# Altium PCB lab1_samarin_usb_rs485.PcbDoc
Units mm, origin at the board's own origin, x right, y up, seen from the top; angles counter-clockwise.
Board outline 78 x 25 mm, 4 copper layers (Top Layer, Signal Layer 1, Signal Layer 2, Bottom Layer), stack 1.522 mm thick; 22 components, 24 nets, 86 pads, 98 vias.
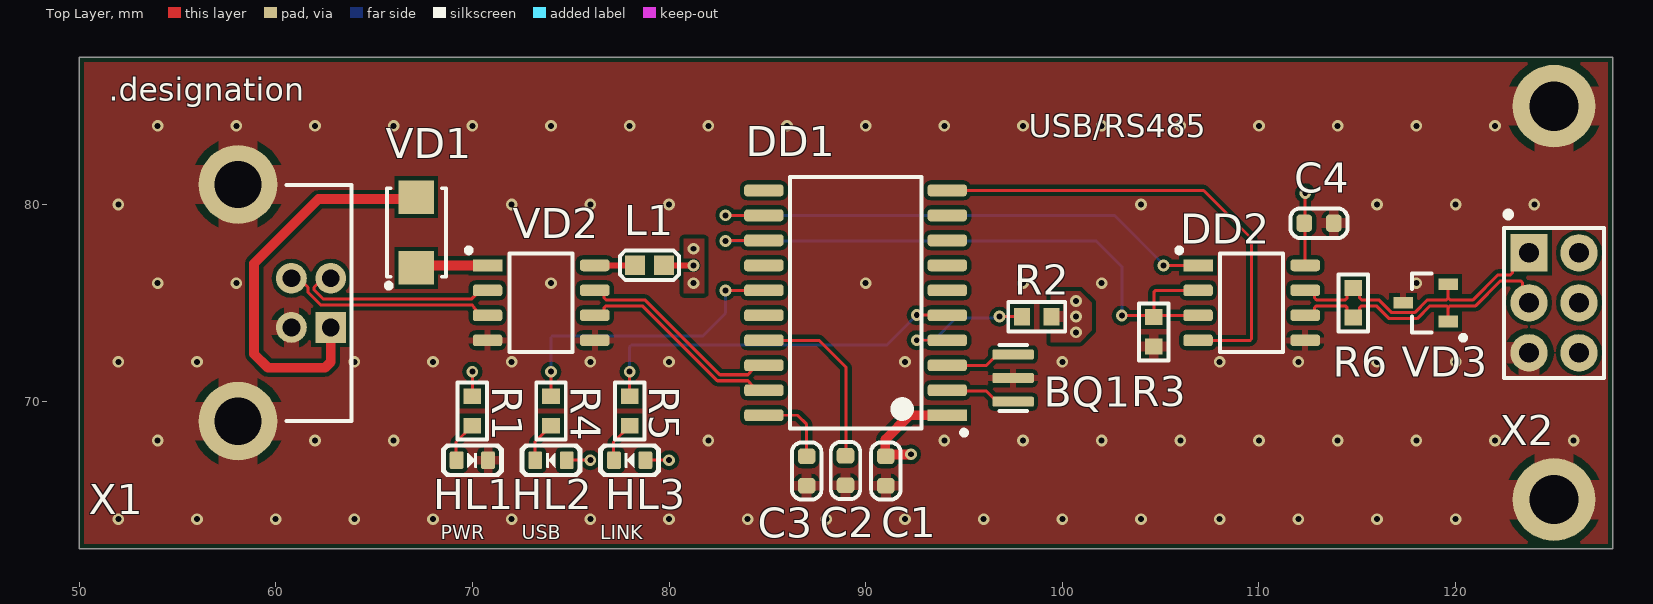
[diagram p0: Top Layer view]
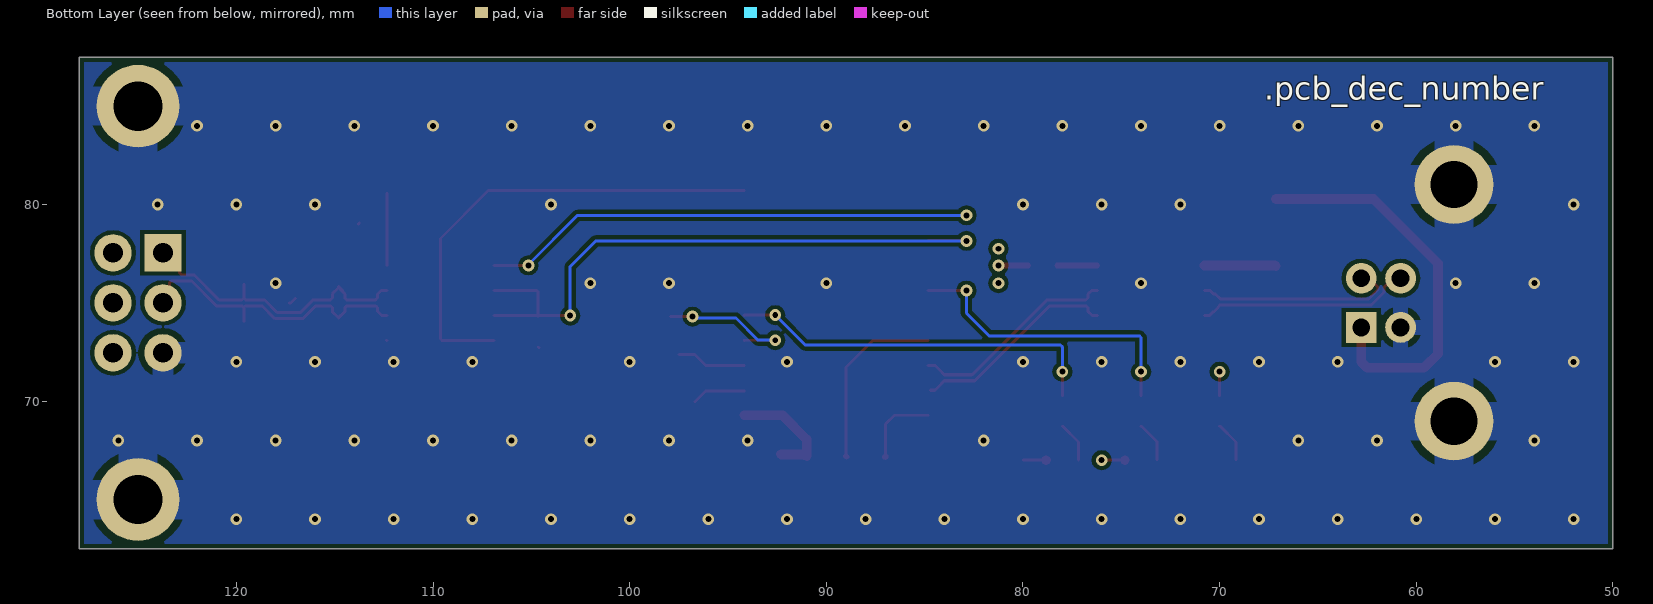
[diagram p1: Bottom Layer view, seen from below]
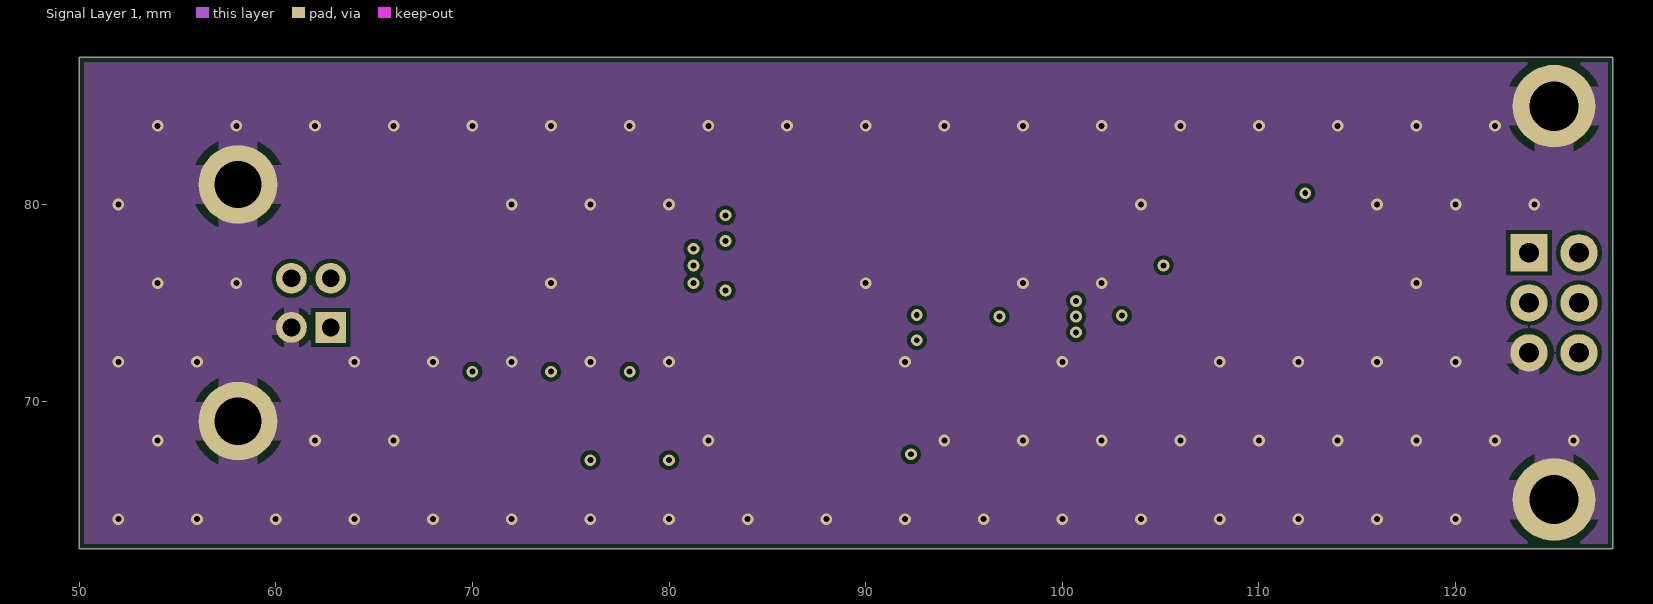
[diagram p2: Signal Layer 1]
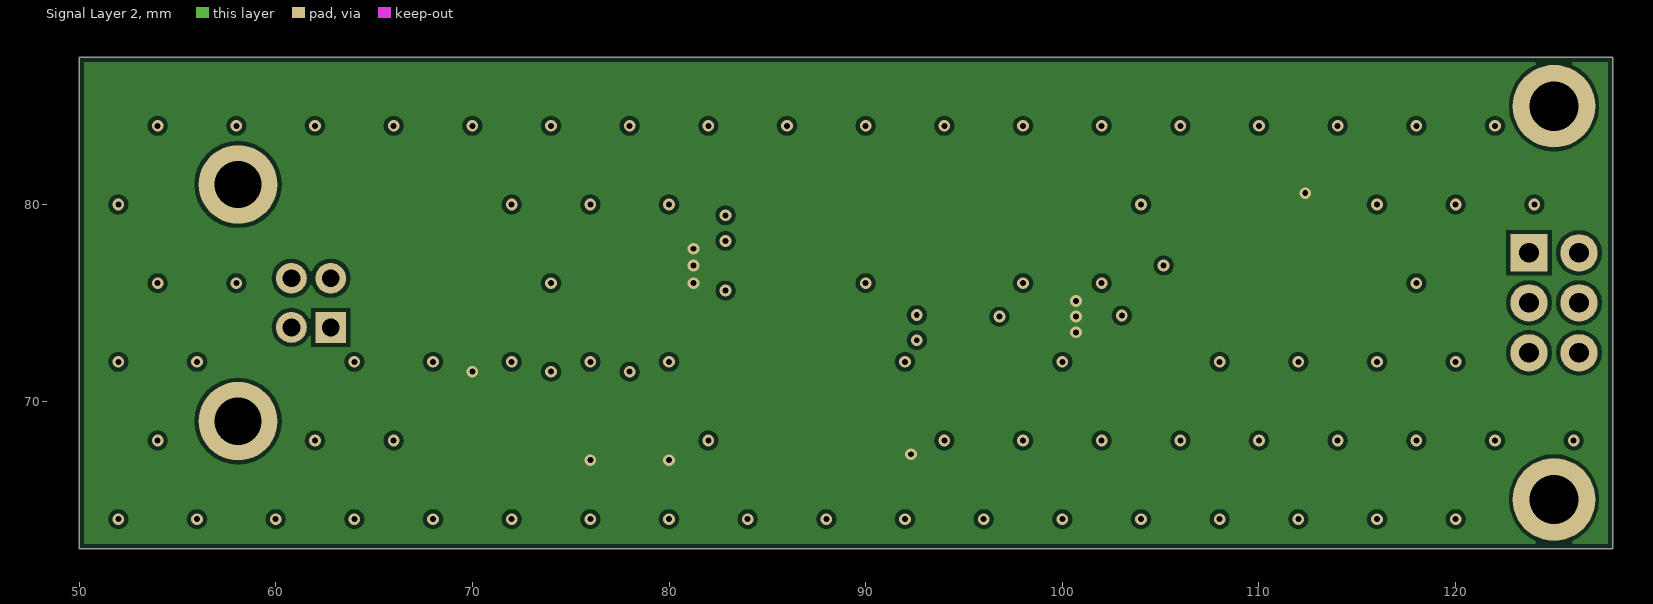
[diagram p3: Signal Layer 2]

## Layer stack, top to bottom
Top Solder: solder mask 0.0102, Solder Resist, Dk 3.5
Top Layer: signal copper 0.018
Prepreg 1: prepreg 0.125, FR4 HiTg170, Dk 5.07
Signal Layer 1: signal copper 0.018
Core 1: core 1.2, FR4, Dk 4.6
Signal Layer 2: signal copper 0.018
Prepreg 2: prepreg 0.125, FR4 HiTg170, Dk 5.07
Bottom Layer: signal copper 0.018
Bottom Solder: solder mask 0.0102, Solder Resist, Dk 3.5

## Board outline
50,62.5 128,62.5 128,87.5 50,87.5

## Design rules (kind name [scope] priority, off if disabled: settings)
AcuteAngle min_acute_angle [OnCopper] p1: minimum=3.50000000000000E+0001 checktracksonly=FALSE // Минимальный угол между примитивами топологии
BoardOutlineClearance board_outline_clearance_std [NOT (OnLayer('Bottom Overlay') OR OnLayer('Top Overlay'))] p1: gap=0.25 ignorepadtopadclearanceinfootprint=FALSE except(0: Arc-SplitContinuation Track-SplitContinuation SMDPad-SplitContinuation THPad-SplitContinuation Via-SplitContinuation Fill-SplitContinuation Poly-SplitContinuation Region-SplitContinuation Text-SplitContinuation) // Отступ элементов топологии от края фрезеруемой печатной платы
Clearance clearance_outer_18um_std [OnTopLayer OR OnBottomLayer] p1: gap=0.125 ignorepadtopadclearanceinfootprint=TRUE except(0.2: Arc-Fill Arc-Poly Track-Fill Track-Poly SMDPad-SMDPad SMDPad-Fill SMDPad-Poly THPad-Fill THPad-Poly Via-Fill Via-Poly Fill-Fill Fill-Poly Poly-Poly Poly-Region Poly-Text; 0.25: Arc-Hole Track-Hole SMDPad-Hole THPad-Hole Via-Hole Fill-Hole Poly-Hole Region-Hole Text-Hole) // Зазоры на внешних слоях
Clearance clearance_inner_18um_std [NOT (OnTopLayer Or OnBottomLayer)] p2: gap=0.125 ignorepadtopadclearanceinfootprint=FALSE except(0.2: Arc-Fill Arc-Poly Track-Fill Track-Poly SMDPad-SMDPad SMDPad-Fill SMDPad-Poly THPad-Fill THPad-Poly Via-Fill Via-Poly Fill-Fill Fill-Poly Poly-Poly Poly-Region Poly-Text; 0.25: Arc-Hole Track-Hole SMDPad-Hole THPad-Hole Via-Hole Fill-Hole Poly-Hole Region-Hole Text-Hole) // Зазоры на внутренних слоях
ComponentClearance [All] p1: gap=0 collisioncheckmode=3 verticalgap=0 showdistances=FALSE
DiffPairsRouting "Schematic Differential Pairs Routing_10" [InNet('RS485_P')] p1: maxlimit=0.254 minlimit=0.15 mostfreqgap=0.254 toplayer_maxgap=0.15 toplayer_prefgap=0.15 toplayer_minwidth=0.155 toplayer_maxwidth=0.155 toplayer_prefwidth=0.155 bottomlayer_maxgap=0.15 bottomlayer_prefgap=0.15 bottomlayer_minwidth=0.155 bottomlayer_maxwidth=0.155 bottomlayer_prefwidth=0.155 impedanceprofiledriven=TRUE impedanceprofileid={1B1F1868-2FFB-4D51-908A-913D90CA9AFC} impedanceprofilevalue=95.000000 maxuncoupledlength=12.7
DiffPairsRouting "Schematic Differential Pairs Routing_9" [InNet('USB_D_IN_P')] p2: maxlimit=0.254 minlimit=0.15 mostfreqgap=0.254 toplayer_maxgap=0.15 toplayer_prefgap=0.15 toplayer_minwidth=0.155 toplayer_maxwidth=0.155 toplayer_prefwidth=0.155 bottomlayer_maxgap=0.15 bottomlayer_prefgap=0.15 bottomlayer_minwidth=0.155 bottomlayer_maxwidth=0.155 bottomlayer_prefwidth=0.155 impedanceprofiledriven=TRUE impedanceprofileid={1B1F1868-2FFB-4D51-908A-913D90CA9AFC} impedanceprofilevalue=95.000000 maxuncoupledlength=12.7
DiffPairsRouting "Schematic Differential Pairs Routing_8" [InNet('USB_D_IN_N')] p3: maxlimit=0.254 minlimit=0.15 mostfreqgap=0.254 toplayer_maxgap=0.15 toplayer_prefgap=0.15 toplayer_minwidth=0.155 toplayer_maxwidth=0.155 toplayer_prefwidth=0.155 bottomlayer_maxgap=0.15 bottomlayer_prefgap=0.15 bottomlayer_minwidth=0.155 bottomlayer_maxwidth=0.155 bottomlayer_prefwidth=0.155 impedanceprofiledriven=TRUE impedanceprofileid={1B1F1868-2FFB-4D51-908A-913D90CA9AFC} impedanceprofilevalue=95.000000 maxuncoupledlength=12.7
DiffPairsRouting "Schematic Differential Pairs Routing_7" [InNet('USB_D_N')] p4: maxlimit=0.254 minlimit=0.15 mostfreqgap=0.254 toplayer_maxgap=0.15 toplayer_prefgap=0.15 toplayer_minwidth=0.155 toplayer_maxwidth=0.155 toplayer_prefwidth=0.155 bottomlayer_maxgap=0.15 bottomlayer_prefgap=0.15 bottomlayer_minwidth=0.155 bottomlayer_maxwidth=0.155 bottomlayer_prefwidth=0.155 impedanceprofiledriven=TRUE impedanceprofileid={1B1F1868-2FFB-4D51-908A-913D90CA9AFC} impedanceprofilevalue=95.000000 maxuncoupledlength=12.7
DiffPairsRouting "Schematic Differential Pairs Routing_6" [InNet('USB_D_P')] p5: maxlimit=0.254 minlimit=0.15 mostfreqgap=0.254 toplayer_maxgap=0.15 toplayer_prefgap=0.15 toplayer_minwidth=0.155 toplayer_maxwidth=0.155 toplayer_prefwidth=0.155 bottomlayer_maxgap=0.15 bottomlayer_prefgap=0.15 bottomlayer_minwidth=0.155 bottomlayer_maxwidth=0.155 bottomlayer_prefwidth=0.155 impedanceprofiledriven=TRUE impedanceprofileid={1B1F1868-2FFB-4D51-908A-913D90CA9AFC} impedanceprofilevalue=95.000000 maxuncoupledlength=12.7
DiffPairsRouting "Schematic Differential Pairs Routing" [InNet('RS485_N')] p6: maxlimit=0.254 minlimit=0.15 mostfreqgap=0.254 toplayer_maxgap=0.15 toplayer_prefgap=0.15 toplayer_minwidth=0.155 toplayer_maxwidth=0.155 toplayer_prefwidth=0.155 bottomlayer_maxgap=0.15 bottomlayer_prefgap=0.15 bottomlayer_minwidth=0.155 bottomlayer_maxwidth=0.155 bottomlayer_prefwidth=0.155 impedanceprofiledriven=TRUE impedanceprofileid={1B1F1868-2FFB-4D51-908A-913D90CA9AFC} impedanceprofilevalue=95.000000 maxuncoupledlength=12.7
DiffPairsRouting "Schematic Differential Pairs Routing_5" [InNet('USB_D_IN_P')] p7: maxlimit=0.254 minlimit=0.15 mostfreqgap=0.254 toplayer_maxgap=0.15 toplayer_prefgap=0.15 toplayer_minwidth=0.155 toplayer_maxwidth=0.155 toplayer_prefwidth=0.155 bottomlayer_maxgap=0.15 bottomlayer_prefgap=0.15 bottomlayer_minwidth=0.155 bottomlayer_maxwidth=0.155 bottomlayer_prefwidth=0.155 impedanceprofiledriven=TRUE impedanceprofileid={1B1F1868-2FFB-4D51-908A-913D90CA9AFC} impedanceprofilevalue=95.000000 maxuncoupledlength=12.7
DiffPairsRouting "Schematic Differential Pairs Routing_4" [InNet('RS485_N')] p8: maxlimit=0.254 minlimit=0.15 mostfreqgap=0.254 toplayer_maxgap=0.15 toplayer_prefgap=0.15 toplayer_minwidth=0.155 toplayer_maxwidth=0.155 toplayer_prefwidth=0.155 bottomlayer_maxgap=0.15 bottomlayer_prefgap=0.15 bottomlayer_minwidth=0.155 bottomlayer_maxwidth=0.155 bottomlayer_prefwidth=0.155 impedanceprofiledriven=TRUE impedanceprofileid={1B1F1868-2FFB-4D51-908A-913D90CA9AFC} impedanceprofilevalue=95.000000 maxuncoupledlength=12.7
DiffPairsRouting "Schematic Differential Pairs Routing_3" [InNet('USB_D_P')] p9: maxlimit=0.254 minlimit=0.15 mostfreqgap=0.254 toplayer_maxgap=0.15 toplayer_prefgap=0.15 toplayer_minwidth=0.155 toplayer_maxwidth=0.155 toplayer_prefwidth=0.155 bottomlayer_maxgap=0.15 bottomlayer_prefgap=0.15 bottomlayer_minwidth=0.155 bottomlayer_maxwidth=0.155 bottomlayer_prefwidth=0.155 impedanceprofiledriven=TRUE impedanceprofileid={1B1F1868-2FFB-4D51-908A-913D90CA9AFC} impedanceprofilevalue=95.000000 maxuncoupledlength=12.7
DiffPairsRouting "Schematic Differential Pairs Routing_2" [InNet('USB_D_N')] p10: maxlimit=0.254 minlimit=0.15 mostfreqgap=0.254 toplayer_maxgap=0.15 toplayer_prefgap=0.15 toplayer_minwidth=0.155 toplayer_maxwidth=0.155 toplayer_prefwidth=0.155 bottomlayer_maxgap=0.15 bottomlayer_prefgap=0.15 bottomlayer_minwidth=0.155 bottomlayer_maxwidth=0.155 bottomlayer_prefwidth=0.155 impedanceprofiledriven=TRUE impedanceprofileid={1B1F1868-2FFB-4D51-908A-913D90CA9AFC} impedanceprofilevalue=95.000000 maxuncoupledlength=12.7
DiffPairsRouting diff_pairs_routing [All] p11: maxlimit=0.254 minlimit=0.127 mostfreqgap=0.254 toplayer_maxgap=0.127 toplayer_prefgap=0.127 toplayer_minwidth=0.143 toplayer_maxwidth=0.143 toplayer_prefwidth=0.143 midlayer1_minwidth=0.381 midlayer1_maxwidth=0.381 midlayer1_prefwidth=0.381 midlayer2_minwidth=0.381 midlayer2_maxwidth=0.381 midlayer2_prefwidth=0.381 bottomlayer_maxgap=0.127 bottomlayer_prefgap=0.127 bottomlayer_minwidth=0.143 bottomlayer_maxwidth=0.143 bottomlayer_prefwidth=0.143 impedanceprofiledriven=TRUE maxuncoupledlength=12.7 // Правила трассировки дифференциальных пар
HoleSize min_hole_size_std [IsPad] p1: absolutevalues=TRUE maxlimit=5.9 minlimit=0.6 maxpercent=80.000 minpercent=20.000 // Диаметр межслойного переходного отверстия
HoleSize min_hole_size_via_std [IsVia] p2: absolutevalues=TRUE maxlimit=5.9 minlimit=0.3 maxpercent=80.000 minpercent=20.000 // Минимальный диаметр монтажного отверстия
HoleToHoleClearance hole_to_hole_clearance_std [All] p1: gap=0.2 allowstackedmicrovias=FALSE // Минимальное расстояние между краями двух отверстий
MinimumAnnularRing min_via_ar_std [All] p1: minimumring=0.15 // Поясок площадки переходного отверстия (Annular ring VIA)
MinimumAnnularRing min_pad_ar_std [All] p2: minimumring=0.2 // Поясок монтажной контактной площадки (Annular ring PAD)
MinimumSolderMaskSliver min_solder_mask_bridge_std [All] p1: minsoldermaskwidth=0.15 // Мнимальная ширина масочного мостика
PlaneClearance plane_clearance_18um_std [All] p1: clearance=0.2 // Отступ полигона (для слоя plane) от элементов топологии
PlaneConnect [All] p1: planeconnectstyle=Relief reliefexpansion=0.5 reliefentries=4 reliefconductorwidth=0.2 reliefairgap=0.2
PolygonConnect poly_connect_to_pad<=0.3 [(AsMM(PadXSize_AllLayers)<=0.301) or (AsMM(PadYSize_AllLayers)<=0.301)] p1: thpad.connectstyle=Relief thpad.reliefconductorwidth=0.2 thpad.reliefentries=4 thpad.polygonreliefangle="90 Angle" thpad.airgapwidth=0.2 smdpad.connectstyle=Relief smdpad.reliefconductorwidth=0.2 smdpad.reliefentries=4 smdpad.polygonreliefangle="90 Angle" smdpad.airgapwidth=0.2 via.connectstyle=Direct via.reliefconductorwidth=0.254 via.reliefentries=4 via.polygonreliefangle="90 Angle" via.airgapwidth=0.254 // Правила подключения полигонов для падов от 0,3мм и меньше
PolygonConnect poly_connect_to_pad<=0.4 [(AsMM(PadXSize_AllLayers)<=0.401) or (AsMM(PadYSize_AllLayers)<=0.401)] p2: thpad.connectstyle=Relief thpad.reliefconductorwidth=0.26 thpad.reliefentries=4 thpad.polygonreliefangle="90 Angle" thpad.airgapwidth=0.2 smdpad.connectstyle=Relief smdpad.reliefconductorwidth=0.26 smdpad.reliefentries=4 smdpad.polygonreliefangle="90 Angle" smdpad.airgapwidth=0.2 via.connectstyle=Direct via.reliefconductorwidth=0.254 via.reliefentries=4 via.polygonreliefangle="90 Angle" via.airgapwidth=0.254 // Правила подключения полигонов для падов от 0,4 и меньше
PolygonConnect poly_connect_to_pad<=0.6 [(AsMM(PadXSize_AllLayers)<=0.601) or (AsMM(PadYSize_AllLayers)<=0.601)] p3: thpad.connectstyle=Relief thpad.reliefconductorwidth=0.33 thpad.reliefentries=4 thpad.polygonreliefangle="90 Angle" thpad.airgapwidth=0.2 smdpad.connectstyle=Relief smdpad.reliefconductorwidth=0.33 smdpad.reliefentries=4 smdpad.polygonreliefangle="90 Angle" smdpad.airgapwidth=0.2 via.connectstyle=Direct via.reliefconductorwidth=0.254 via.reliefentries=4 via.polygonreliefangle="90 Angle" via.airgapwidth=0.254 // Правила подключения полигонов для падов от 0,6мм и меньше
PolygonConnect poly_connect_to_pad<=0.7 [(AsMM(PadXSize_AllLayers)<=0.701) or (AsMM(PadYSize_AllLayers)<=0.701)] p4: thpad.connectstyle=Relief thpad.reliefconductorwidth=0.46 thpad.reliefentries=4 thpad.polygonreliefangle="90 Angle" thpad.airgapwidth=0.2 smdpad.connectstyle=Relief smdpad.reliefconductorwidth=0.46 smdpad.reliefentries=4 smdpad.polygonreliefangle="90 Angle" smdpad.airgapwidth=0.2 via.connectstyle=Direct via.reliefconductorwidth=0.254 via.reliefentries=4 via.polygonreliefangle="90 Angle" via.airgapwidth=0.254 // Правила подключения полигонов для падов от 0,7мм и меньше
PolygonConnect poly_connect_to_pad<=0.8 [(AsMM(PadXSize_AllLayers)<=0.8)or(AsMM(PadYSize_AllLayers)<=0.8)] p5: thpad.connectstyle=Relief thpad.reliefconductorwidth=0.53 thpad.reliefentries=4 thpad.polygonreliefangle="90 Angle" thpad.airgapwidth=0.3 smdpad.connectstyle=Relief smdpad.reliefconductorwidth=0.53 smdpad.reliefentries=4 smdpad.polygonreliefangle="90 Angle" smdpad.airgapwidth=0.2 via.connectstyle=Direct via.reliefconductorwidth=0.254 via.reliefentries=4 via.polygonreliefangle="90 Angle" via.airgapwidth=0.254 // Правила подключения полигонов для падов от 0,8мм и меньше
PolygonConnect poly_connect_to_pad<=1 [(AsMM(PadXSize_AllLayers)<=1.01)or(AsMM(PadYSize_AllLayers)<=1.01)] p6: thpad.connectstyle=Relief thpad.reliefconductorwidth=0.6 thpad.reliefentries=4 thpad.polygonreliefangle="90 Angle" thpad.airgapwidth=0.3 smdpad.connectstyle=Relief smdpad.reliefconductorwidth=0.6 smdpad.reliefentries=4 smdpad.polygonreliefangle="90 Angle" smdpad.airgapwidth=0.2 via.connectstyle=Direct via.reliefconductorwidth=0.254 via.reliefentries=4 via.polygonreliefangle="90 Angle" via.airgapwidth=0.254 // Правила подключения полигонов для падов от 1мм и меньше
PolygonConnect poly_connect_to_pad<=1.3 [(AsMM(PadXSize_AllLayers)<=1.31)or(AsMM(PadYSize_AllLayers)<=1.31)] p7: thpad.connectstyle=Relief thpad.reliefconductorwidth=0.66 thpad.reliefentries=4 thpad.polygonreliefangle="90 Angle" thpad.airgapwidth=0.3 smdpad.connectstyle=Relief smdpad.reliefconductorwidth=0.86 smdpad.reliefentries=4 smdpad.polygonreliefangle="90 Angle" smdpad.airgapwidth=0.2 via.connectstyle=Direct via.reliefconductorwidth=0.254 via.reliefentries=4 via.polygonreliefangle="90 Angle" via.airgapwidth=0.254 // Правила подключения полигонов для падов от 1,3мм и меньше
PolygonConnect poly_connect_to_pad<=1.6 [(AsMM(PadXSize_AllLayers)<=1.61)or(AsMM(PadYSize_AllLayers)<=1.61)] p8: thpad.connectstyle=Relief thpad.reliefconductorwidth=0.8 thpad.reliefentries=4 thpad.polygonreliefangle="90 Angle" thpad.airgapwidth=0.3 smdpad.connectstyle=Relief smdpad.reliefconductorwidth=1 smdpad.reliefentries=4 smdpad.polygonreliefangle="90 Angle" smdpad.airgapwidth=0.2 via.connectstyle=Direct via.reliefconductorwidth=0.254 via.reliefentries=4 via.polygonreliefangle="90 Angle" via.airgapwidth=0.254 // Правила подключения полигонов для падов от 1,6мм и меньше
PolygonConnect poly_connect_to_pad<=1.8 [(AsMM(PadXSize_AllLayers)<=1.8)or(AsMM(PadYSize_AllLayers)<=1.8)] p9: thpad.connectstyle=Relief thpad.reliefconductorwidth=1 thpad.reliefentries=4 thpad.polygonreliefangle="90 Angle" thpad.airgapwidth=0.3 smdpad.connectstyle=Relief smdpad.reliefconductorwidth=1.2 smdpad.reliefentries=4 smdpad.polygonreliefangle="90 Angle" smdpad.airgapwidth=0.2 via.connectstyle=Direct via.reliefconductorwidth=0.254 via.reliefentries=4 via.polygonreliefangle="90 Angle" via.airgapwidth=0.254 // Правила подключения полигонов для падов от 1,8мм и меньше
PolygonConnect poly_connect_to_pad<=2 [(AsMM(PadXSize_AllLayers)<=2.01)or(AsMM(PadYSize_AllLayers)<=2.01)] p10: thpad.connectstyle=Relief thpad.reliefconductorwidth=1.1 thpad.reliefentries=4 thpad.polygonreliefangle="90 Angle" thpad.airgapwidth=0.3 smdpad.connectstyle=Relief smdpad.reliefconductorwidth=1.4 smdpad.reliefentries=4 smdpad.polygonreliefangle="90 Angle" smdpad.airgapwidth=0.2 via.connectstyle=Direct via.reliefconductorwidth=0.254 via.reliefentries=4 via.polygonreliefangle="90 Angle" via.airgapwidth=0.254 // Правила подключения полигонов для падов от 2мм и меньше
PolygonConnect poly_connect_to_pad<=2.3 [(AsMM(PadXSize_AllLayers)<=2.31)or(AsMM(PadYSize_AllLayers)<=2.31)] p11: thpad.connectstyle=Relief thpad.reliefconductorwidth=1.2 thpad.reliefentries=4 thpad.polygonreliefangle="90 Angle" thpad.airgapwidth=0.3 smdpad.connectstyle=Relief smdpad.reliefconductorwidth=1.4 smdpad.reliefentries=4 smdpad.polygonreliefangle="90 Angle" smdpad.airgapwidth=0.2 via.connectstyle=Direct via.reliefconductorwidth=0.254 via.reliefentries=4 via.polygonreliefangle="90 Angle" via.airgapwidth=0.254 // Правила подключения полигонов для падов от 2,3мм и меньше
PolygonConnect poly_connect_to_pad<=2.5 [(AsMM(PadXSize_AllLayers)<=2.51)or(AsMM(PadYSize_AllLayers)<=2.51)] p12: thpad.connectstyle=Relief thpad.reliefconductorwidth=1.2 thpad.reliefentries=4 thpad.polygonreliefangle="90 Angle" thpad.airgapwidth=0.3 smdpad.connectstyle=Relief smdpad.reliefconductorwidth=1.4 smdpad.reliefentries=4 smdpad.polygonreliefangle="90 Angle" smdpad.airgapwidth=0.2 via.connectstyle=Direct via.reliefconductorwidth=0.254 via.reliefentries=4 via.polygonreliefangle="90 Angle" via.airgapwidth=0.254 // Правила подключения полигонов для падов от 2,5мм и меньше
PolygonConnect poly_connect_to_pad<=2.7 [(AsMM(PadXSize_AllLayers)<=2.71)or(AsMM(PadYSize_AllLayers)<=2.71)] p13: thpad.connectstyle=Relief thpad.reliefconductorwidth=1.4 thpad.reliefentries=4 thpad.polygonreliefangle="90 Angle" thpad.airgapwidth=0.3 smdpad.connectstyle=Relief smdpad.reliefconductorwidth=1.6 smdpad.reliefentries=4 smdpad.polygonreliefangle="90 Angle" smdpad.airgapwidth=0.2 via.connectstyle=Direct via.reliefconductorwidth=0.254 via.reliefentries=4 via.polygonreliefangle="90 Angle" via.airgapwidth=0.254 // Правила подключения полигонов для падов от 2,7мм и меньше
PolygonConnect poly_connect_to_pad<=3 [(AsMM(PadXSize_AllLayers)<=3.01)or(AsMM(PadYSize_AllLayers)<=3.01)] p14: thpad.connectstyle=Relief thpad.reliefconductorwidth=1.6 thpad.reliefentries=4 thpad.polygonreliefangle="90 Angle" thpad.airgapwidth=0.3 smdpad.connectstyle=Relief smdpad.reliefconductorwidth=1.8 smdpad.reliefentries=4 smdpad.polygonreliefangle="90 Angle" smdpad.airgapwidth=0.2 via.connectstyle=Direct via.reliefconductorwidth=0.254 via.reliefentries=4 via.polygonreliefangle="90 Angle" via.airgapwidth=0.254 // Правила подключения полигонов для падов от 3мм и меньше
PolygonConnect poly_connect_to_pad<=7 [(AsMM(PadXSize_AllLayers)<7.01)or(AsMM(PadYSize_AllLayers)<=7.01)] p15: thpad.connectstyle=Relief thpad.reliefconductorwidth=2 thpad.reliefentries=4 thpad.polygonreliefangle="90 Angle" thpad.airgapwidth=0.4 smdpad.connectstyle=Relief smdpad.reliefconductorwidth=2 smdpad.reliefentries=4 smdpad.polygonreliefangle="90 Angle" smdpad.airgapwidth=0.3 via.connectstyle=Direct via.reliefconductorwidth=0.254 via.reliefentries=4 via.polygonreliefangle="90 Angle" via.airgapwidth=0.254 // Правила подключения полигонов для падов от 7мм и меньше
PolygonConnect poly_connect_to_pad [All] p16: thpad.connectstyle=Relief thpad.reliefconductorwidth=0.25 thpad.reliefentries=4 thpad.polygonreliefangle="90 Angle" thpad.airgapwidth=0.2 smdpad.connectstyle=Relief smdpad.reliefconductorwidth=0.25 smdpad.reliefentries=4 smdpad.polygonreliefangle="90 Angle" smdpad.airgapwidth=0.2 via.connectstyle=Direct via.reliefconductorwidth=0.25 via.reliefentries=4 via.polygonreliefangle="90 Angle" via.airgapwidth=0.2 // Правила подключения полигонов общие
RoutingCorners [All] p1 off: cornerstyle=45-Degree minsetback=2.5 maxsetback=2.5
RoutingVias [All] p1: holewidth=0.3 width=0.6 viastyle="Through Hole" minholewidth=0.3 minwidth=0.6 maxholewidth=5.9 maxwidth=6.4
SilkToSilkClearance silk_to_silk_clearance_std [All] p1 off: silktosilkclearance=0.15 // Отступ текста шелкографии от других примитивов шелкографии
SilkToSolderMaskClearance silk_to_solder_mask_clearance_std [IsPad] p1 off: minsilkscreentomaskgap=0.15 clearancetoexposedcopper=FALSE // Минимальное расстояние между элементами шелкографии и вскрытой медью
SolderMaskExpansion solder_mask_expansion_std [All] p1: expansion=0.05 // Припуск паяльной масски
UnRoutedNet [All] p1: checkbadconnections=TRUE
Width width_18um_std [All] p1: maxlimit=10 minlimit=0.125 preferedwidth=0.15 checkconnectedcopper=TRUE // Ширина проводников (общая)
19 further rules are at their usual default settings.

## Classes and differential pairs
differential pair class USB_SIGNALS: RS485 USB_D USB_D_IN
differential pair USB_D: +USB_D_P -USB_D_N
differential pair USB_D_IN: +USB_D_IN_P -USB_D_IN_N
differential pair RS485: +RS485_P -RS485_N

## Components (designator, comment, footprint, x,y, rotation, side; value= is the part's Value field where it differs from the comment)
BQ1 "CSTCE12M0G52A-R0" CSTCE-3-320X130X70 97.5,71.175 r90 top
C1 "4,7 мк" C0603 91.025,66.45 r270 top
C2 "2,2 мк" C0603 88.975,66.475 r270 top
C3 "0,22 мк" C0603 87,66.45 r270 top
C4 "0,1 мк" C0603 113.05,79.05 r0 top
DD1 "MCP2200-l/SO" SOIC-20 89.5,75 r180 top
DD2 "ADM3485ARZ" SOIC-8 109.625,75 r0 top
HL1 "TLMB1100-GS08" HL0603 70,67 r180 top
HL2 "TLMG1100-GS08" HL0603 74,67 r0 top
HL3 "TLMO1100-GS08" HL0603 78,67 r0 top
L1 "BLM18PG221SN1D" BLM-2-0603 79,76.905 r0 top
R1 "220" R0603 70,69.5 r90 top
R2 "10 к" R0603 98.7,74.3 r180 top
R3 "10 к" R0603 104.65,73.525 r90 top
R4 "330" R0603 74,69.5 r270 top
R5 "330" R0603 78,69.5 r270 top
R6 "120" R0603 114.8,75 r90 top
VD1 "SL13-E3/5AT" DO-214AC 67.15,78.575 r90 top
VD2 "USB6B1" SOIC-8 73.5,75 r0 top
VD3 "SM712-02HTG" SOT-23-3 118.475,75 r180 top
X1 "DS1099-WN0" DS1099-WN0 56,75 r270 top
X2 "DS1021-2*3SF11" DS1021-2X3SF11 125,75 r270 top

## Footprints (in the part's own frame and the unit in brackets; to place one, negate y for a bottom-side part, rotate by r counter-clockwise, add the part's x,y. Pads: shape width x height; smd on the part's side, far side on the other; paste and mask are expansions set on the pad)
BLM-2-0603 [mm] "Chip Inductor, 2-Leads, Body 1,60x0,80mm, IPC Medium Density"
  rect 1.02x0.98 smd: 1(-0.74,0) 2(0.74,0)
  silkscreen extent -1.5,-0.75 1.5,0.75, body extent -0.8,-0.37 0.8,0.38, height 0.8
C0603 [mm] "Chip Capacitor, 2-Leads, Body 1,60x0,80mm, IPC Medium Density"
  rrect50% 0.8x0.9 smd: 1(-0.75,0) 2(0.75,0)
  silkscreen extent -1.45,-0.75 1.45,0.75, body extent -0.8,-0.4 0.8,0.4, height 0.8
CSTCE-3-320X130X70 [mm]
  rrect25% 0.5x2.1 smd paste-0.025 mask+0.1: 1(-1.2,0) 2(0,0) 3(1.2,0)
  silkscreen extent -1.68,-0.7 1.67,0.7, body extent -1.6,-0.65 1.6,0.65, height 0.8
DO-214AC [mm] "Molded Diode, 2-Leads, Body 4,25x2,67mm, IPC Medium Density"
  rect 1.7x1.8 smd: 1(-1.8,0) 2(1.8,0)
  silkscreen extent -2.82,-1.5 2.25,1.52, body extent -2.55,-1.3 2.55,1.3, height 2.26
DS1021-2X3SF11 [mm]
  rect 1.9x1.9 hole 1: 1(-2.54,-1.27)
  round 1.9 hole 1: 2(-2.54,1.27) 3(0,-1.27)
  round 1.9 hole 1 mask+0.102: 4(0,1.27) 5(2.54,-1.27) 6(2.54,1.27)
  silkscreen extent -4.5,-2.55 3.81,2.54, body extent -3.81,-2.54 3.81,2.54, height 8.59
DS1099-WN0 [mm]
  rect 1.57x1.57 hole 0.9: 1(1.25,6.8)
  round 1.57 hole 0.9: 2(-1.25,6.8) 3(-1.25,4.8) 4(1.25,4.8)
  round 4 hole 2.4: TP1(-6.02,2.088) TP1(6.02,2.088)
  silkscreen extent -5.99,4.54 6.01,7.86, body extent -7.4,-8.28 7.4,8.22, height 11
HL0603 [mm] "Chip Resistor, 2-Leads, Body 1,60x0,80mm, IPC Medium Density"
  rrect25% 0.7x0.9 smd: 1(-0.8,0) 2(0.8,0)
  silkscreen extent -1.5,-0.75 1.5,0.75, body extent -0.81,-0.4 0.81,0.4, height 0.64
R0603 [mm] "Chip Resistor, 2-Leads, Body 1,60x0,80mm, IPC Medium Density"
  rect 0.8x0.9 smd: 1(-0.75,0) 2(0.75,0)
  silkscreen extent -1.45,-0.75 1.45,0.75, body extent -0.77,-0.43 0.78,0.43, height 0.43
SOIC-8 [mm] "SOIC, 8-Leads, Body 4,90x3,90mm, Pitch 1,27mm, IPC Medium Density"
  rect 1.5x0.6 smd: 1(-2.725,1.905)
  rrect50% 1.5x0.6 smd: 2(-2.725,0.635) 3(-2.725,-0.635) 4(-2.725,-1.905) 5(2.725,-1.905) 6(2.725,-0.635) 7(2.725,0.635) 8(2.725,1.905)
  silkscreen extent -3.81,-2.5 1.6,2.79, body extent -3.06,-2.47 3.06,2.48, height 1.75
SOIC-20 [mm] "SOIC, 20-Leads, Body 12,80x7,50mm, Pitch 1,27mm, IPC Medium Density"
  rect 2x0.6 smd: 1(-4.65,5.715)
  rrect50% 2x0.6 smd: 2(-4.65,4.445) 3(-4.65,3.175) 4(-4.65,1.905) 5(-4.65,0.635) 6(-4.65,-0.635) 7(-4.65,-1.905) 8(-4.65,-3.175) 9(-4.65,-4.445) 10(-4.65,-5.715) 11(4.675,-5.715) 12(4.675,-4.445) 13(4.675,-3.175) 14(4.675,-1.905) 15(4.675,-0.635) 16(4.675,0.635) 17(4.675,1.905) 18(4.675,3.175) 19(4.675,4.445) 20(4.675,5.715)
  silkscreen extent -5.63,-6.4 3.35,6.72, body extent -5.24,-6.42 5.24,6.43, height 2.65
SOT-23-3 [mm] "SOT-23, 3-Leads, Body 2,92x2,37mm"
  rect 1x0.6 smd: 1(-1.145,0.95) 2(-1.145,-0.95) 3(1.145,0)
  silkscreen extent -2.03,-1.5 0.7,1.9, body extent -1.25,-1.5 1.25,1.5, height 1.1

## Part data
BQ1: library part bq0001, "=Описание", HelpURL=https://www.murata.com/en-us/products/productdetail?partno=CSTCE12M0G52A-R0, ID=bq0001, Корпус="3,20 x 1,30 x 0,70", Наименование=CSTCE12M0G52A-R0, Описание="Кварцевый резонатор 12 МГц", Производитель="Murata Manufacturing Co., Ltd.", Фамилия=Самарин, Частота="12 МГц"
C1: library part c0111, "=Описание", HelpURL=https://www.yageo.com/upload/media/product/productsearch/datasheet/mlcc/UPY-GPHC_X5R_4V-to-50V_26.pdf, ID=c0111, Корпус=0603, Наименование=CC0603KRX5R8BB475, Напряжение="25 В", Номинал="4,7 мк", Номинальное напряжение="25 В", Описание="Конденсатор керамический чип 0603 4,7 мкФ 25 В ±10 %", Отклонение="±10 %", Производитель="YAGEO Corp.", Рабочие температуры="от –55 °С до +85 °С", Температурный коэффициент емкости=X5R, Фамилия=Ларионов
C2: library part c0102, "=Описание", HelpURL=https://www.yageo.com/upload/media/product/productsearch/datasheet/mlcc/UPY-GPHC_X5R_4V-to-50V_26.pdf, ID=c0102, Корпус=0603, Наименование=CC0603KRX5R9BB225, Напряжение="50 В", Номинал="2,2 мк", Номинальное напряжение="50 В", Описание="Конденсатор керамический чип 0603 2,2 мкФ 50 В ±10 %", Отклонение="±10 %", Производитель="YAGEO Corp.", Рабочие температуры="от –55 °С до +85 °С", Температурный коэффициент емкости=X5R, Фамилия=Самарин
C3: library part c0072, "=Описание", HelpURL=https://www.yageo.com/upload/media/product/productsearch/datasheet/mlcc/UPY-GPHC_X7R_6.3V-to-50V_20.pdf, ID=c0072, Корпус=0603, Наименование=CC0603JRX7R9BB224, Напряжение="50 В", Номинал="0,22 мк", Номинальное напряжение="50 В", Описание="Конденсатор керамический чип 0603 220 нФ 50 В ±5 %", Отклонение="±5 %", Производитель="YAGEO Corp.", Рабочие температуры="от –55 °С до +125 °С", Температурный коэффициент емкости=X7R, Фамилия=Самарин
C4: library part c0060, "=Описание", HelpURL=https://www.yageo.com/upload/media/product/productsearch/datasheet/mlcc/UPY-GPHC_X7R_6.3V-to-50V_20.pdf, ID=c0060, Корпус=0603, Наименование=CC0603JRX7R9BB104, Напряжение="50 В", Номинал="0,1 мк", Номинальное напряжение="50 В", Описание="Конденсатор керамический чип 0603 100 нФ 50 В ±5 %", Отклонение="±5 %", Производитель="YAGEO Corp.", Рабочие температуры="от –55 °С до +125 °С", Температурный коэффициент емкости=X7R, Фамилия=Ларионов
DD1: library part dd0008, "=Описание", HelpURL=https://www.microchip.com/wwwproducts/en/mcp2200, ID=dd0008, Корпус=SOIC-20, Наименование=MCP2200-l/SO, Описание="Преобразователь USB-UART", Производитель="Microchip Technology Inc.", Фамилия=Самарин
DD2: library part dd0011, "=Описание", HelpURL=https://www.analog.com/ru/products/adm3485.html, ID=dd0011, Корпус=SOIC-8, Наименование=ADM3485ARZ, Описание="Приемопередатчик RS-485/RS-422", Производитель="Analog Devices, Inc.", Фамилия=Самарин
HL1: library part hl0006, "=Описание", Colour=Синий, HelpURL=https://www.vishay.com/leds/list/product-83173/, ID=hl0006, Корпус=0603, Наименование=TLMB1100-GS08, Номинальная длина волны="466 нм", Номинальная сила света="5 мкд", Номинальное падение напряжения="3,9 В", Номинальный прямой ток="30 мА", Описание="Светодиод чип 0603 синий", Примечание="Not for new design", Производитель="Vishay Intertechnology, Inc.", Рабочие температуры="от –40 °С до +100 °С", Рассеиваемая мощность="90 мВт", Фамилия=Ларионов, Цвет=Синий
HL2: library part hl0005, "=Описание", Colour=Зеленый, HelpURL=https://www.vishay.com/leds/list/product-83173/, ID=hl0005, Корпус=0603, Наименование=TLMG1100-GS08, Номинальная длина волны="570 нм", Номинальная сила света="35 мкд", Номинальное падение напряжения="2,1 В", Номинальный прямой ток="30 мА", Описание="Светодиод чип 0603 зеленый", Производитель="Vishay Intertechnology, Inc.", Рабочие температуры="от –40 °С до +100 °С", Рассеиваемая мощность="90 мВт", Фамилия=Ларионов, Цвет=Зеленый
HL3: library part hl0004, "=Описание", Colour=Оранжевый, HelpURL=https://www.vishay.com/leds/list/product-83173/, ID=hl0004, Корпус=0603, Наименование=TLMO1100-GS08, Номинальная длина волны="606 нм", Номинальная сила света="80 мкд", Номинальное падение напряжения="2,1 В", Номинальный прямой ток="30 мА", Описание="Светодиод чип 0603 оранжевый", Производитель="Vishay Intertechnology, Inc.", Рабочие температуры="от –40 °С до +100 °С", Рассеиваемая мощность="90 мВт", Фамилия=Ларионов, Цвет=Оранжевый
L1: library part l0002, "=Описание", HelpURL=https://www.murata.com/en-global/products/productdetail?partno=BLM18PG221SN1%23, ID=l0002, Корпус=0603, Наименование=BLM18PG221SN1D, Описание="Ферритовая бусина 220 Ом ±25 %", Отклонение, 100 МГц="±25 %", Производитель="Murata Manufacturing Co., Ltd.", Рабочие температуры="от –55 °С до +125 °С", Сопротивление, 100 МГц="220 Ом", Сопротивление при постоянном токе="0,1 Ом", Фамилия=Самарин
R1: library part r0007, "=Описание", HelpURL=https://www.yageo.com/upload/media/product/productsearch/datasheet/rchip/PYu-RC_Group_51_RoHS_L_11.pdf, ID=r0007, Корпус=0603, Наименование=RC0603FR-07220RL, Номинал=220, Номинальное напряжение="75 В", Номинальный ток="1 А", Описание="Резистор чип 0603 220 Ом ±1 % 0,1 Вт", Отклонение="±1 %", Производитель=Yageo, Рабочие температуры="от -55 °С до +155 °С", Фамилия=Ларионов
R2: library part r0009, "=Описание", HelpURL=https://www.yageo.com/upload/media/product/productsearch/datasheet/rchip/PYu-RC_Group_51_RoHS_L_11.pdf, ID=r0009, Корпус=0603, Наименование=RC0603FR-0710KL, Номинал="10 к", Номинальное напряжение="75 В", Номинальный ток="1 А", Описание="Резистор чип 0603 10 кОм ±1 % 0,1 Вт", Отклонение="±1 %", Производитель=Yageo, Рабочие температуры="от -55 °С до +155 °С", Фамилия=Самарин
R3: library part r0012, "=Описание", HelpURL=https://www.yageo.com/upload/media/product/productsearch/datasheet/rchip/PYu-RC_Group_51_RoHS_L_11.pdf, ID=r0012, Корпус=0603, Наименование=RC0603FR-0710KL, Номинал="10 к", Номинальное напряжение="75 В", Номинальный ток="1 А", Описание="Резистор чип 0603 10 кОм ±1 % 0,1 Вт", Отклонение="±1 %", Производитель=Yageo, Рабочие температуры="от -55 °С до +155 °С", Фамилия=Самарин
R4 R5: library part r0008, "=Описание", HelpURL=https://www.yageo.com/upload/media/product/productsearch/datasheet/rchip/PYu-RC_Group_51_RoHS_L_11.pdf, ID=r0008, Корпус=0603, Наименование=RC0603FR-07330RL, Номинал=330, Номинальное напряжение="75 В", Номинальный ток="1 А", Описание="Резистор чип 0603 330 Ом ±1 % 0,1 Вт", Отклонение="±1 %", Производитель=Yageo, Рабочие температуры="от -55 °С до +155 °С", Фамилия=Ларионов
R6: library part r0006, "=Описание", HelpURL=https://www.yageo.com/upload/media/product/productsearch/datasheet/rchip/PYu-RC_Group_51_RoHS_L_11.pdf, ID=r0006, Корпус=0603, Наименование=RC0603FR??07120RL, Номинал=120, Номинальное напряжение="75 В", Номинальный ток="1 А", Описание="Резистор чип 0603 120 Ом ±1 % 0,1 Вт", Отклонение="±1 %", Производитель=Yageo, Рабочие температуры="от -55 °С до +155 °С", Фамилия=Самарин
VD1: library part vd0003, "=Описание", HelpURL=https://www.vishay.com/product?docid=88740, ID=vd0003, Корпус=DO-214AC, Максимальное обратное напряжение="30 В", Максимальное прямое напряжение="0,445 В", Максимальный прямой ток="1,5 А", Наименование=SL13-E3/5AT, Описание="Диод Шоттки 30 В 1,5 А", Производитель="Vishay Intertechnology, Inc.", Рабочие температуры="от –55 °С до +125 °С", Фамилия=Ларионов
VD2: library part vd0010, "=Описание", HelpURL=https://www.st.com/content/st_com/en/products/protection-devices/esd-protection/usb-port-protection/usb6b1.html, ID=vd0010, Корпус=SOIC-8, Наименование=USB6B1, Описание="Диодная сборка для подавления помех, от 6 В", Производитель=STMicroelectronics, Фамилия=Ларионов
VD3: library part vd0002, "=Описание", HelpURL=https://www.littelfuse.com/products/tvs-diode-arrays/general-purpose-esd-protection/sm712.aspx, ID=vd0002, Корпус=SOT-23-3, Наименование=SM712-02HTG, Описание="Диодная сборка для подавления помех, –7/12 В", Производитель="Littelfuse, Inc.", Фамилия=Самарин
X1: library part x0005, "=Описание", Contact_1=VBUS, Contact_2=D-, Contact_3=D+, Contact_4=GND, HelpURL=http://www.connfly.com/productshow.aspx?id=407, ID=x0005, Наименование=DS1099-WN0, Описание="USB Type B гнездо", Производитель="Connfly Electronic Co. LTD", Фамилия=Самарин
X2: library part x0003, "=Описание", Contact_1=B, Contact_2=NC, Contact_3=A, Contact_4=NC, Contact_5=GND, Contact_6=NC, HelpURL=http://www.connfly.com/productshow.aspx?id=118, ID=x0003, Наименование=DS1021-2*3SF11, Описание="PLS 3x2 pin 2,54 мм вилка прямой", Производитель="Connfly Electronic Co. LTD", Фамилия=Самарин

## Free pads (board coordinates)
  round 4.2 hole 2.5: 2(125,65) 2(125,85)

## Via types
v1: diameter 0.6, hole 0.3, Top Layer to Bottom Layer, tented top, 77 vias
v2: diameter 0.6, hole 0.3, Top Layer to Bottom Layer, tented both sides, 15 vias
v3: diameter 0.6, hole 0.3, Top Layer to Signal Layer 2, tented both sides, 6 vias

## Nets (pads, with @x,y where several pads share a name; then routed paths per layer and width w, separated by ;. In a path a pad name is that pad's centre, name@x,y a point inside that pad or via, vN(x,y) a via of type N, cw(c..) or ccw(c..) an arc to the next point about the centre after c; other vN are vias at no path point)
5V_IN: VD1.2 X1.1 | length 20.4
  Top Layer w0.15: X1.1 X1.1@62.9,73.65
  Top Layer w0.5: X1.1 62.8,71.993 62.507,71.7 59.6,71.7 58.9,72.4 58.9,77 62.175,80.275 VD1.2@67.15,80.275
+5V: C1.1 C4.1 DD1.1 DD2.8 HL2.2 HL3.2 L1.2 R1.2 R2.1 | length 14.6
  Top Layer w0.15: R1.2@70,70.275 v2(70,71.5) ; HL2.2@74.825,67 v2(76,67) ; HL3.2@78.825,67 v3(80,67) ; DD2.8 112.35,79.05 v3(112.35,80.575)
  Top Layer w0.3: L1.2 v2(81.25,76.905)
  Top Layer w0.5: v3(92.3,67.3) 92.281,67.281 91.081,67.281 91,67.2 91,68.05 92.235,69.285 DD1.1@94.175,69.285
  other v2: 81.25,76 81.25,77.75
  other v3: 100.7,73.5 100.7,74.3 100.7,75.1
GND: BQ1.2 C1.2 C2.2 C3.2 C4.2 DD2.5 HL1.1 pad.2 R3.1 VD2.4 VD2.5 VD3.3 X1.4 X1.TP1 X2.5 | length 0.6
  Top Layer w0.15: R3.1@104.6,72.7 R3.1@104.65,72.75 ; DD2.5 DD2.5@112.36,73.085 ; C4.2@113.75,79.05 C4.2@113.8,79 ; VD3.3@117,75.225 117.225,75 VD3.3
  other v1: 52,64 56,64 60,64 64,64 68,64 72,64 76,64 80,64 84,64 88,64 92,64 96,64 100,64 104,64 108,64 112,64 116,64 120,64 54,68 62,68 66,68 82,68 94,68 98,68 102,68 106,68 110,68 114,68 118,68 122,68 126,68 52,72 56,72 64,72 68,72 72,72 76,72 80,72 92,72 100,72 108,72 112,72 116,72 120,72 54,76 58,76 74,76 90,76 98,76 102,76 118,76 52,80 72,80 76,80 80,80 104,80 116,80 120,80 124,80 54,84 58,84 62,84 66,84 70,84 74,84 78,84 82,84 86,84 90,84 94,84 98,84 102,84 106,84 110,84 114,84 118,84 122,84
NetBQ1_1: BQ1.1 DD1.2 | length 2.8
  Top Layer w0.15: DD1.2@94.155,70.525 96.125,70.525 BQ1.1@96.68,69.97
NetBQ1_3: BQ1.3 DD1.3 | length 3.6
  Top Layer w0.15: DD1.3@94.175,71.825 96.145,71.825 96.7,72.38 BQ1.3@97.5,72.38
NetC2_1: C2.1 DD1.17 | length 9.3
  Top Layer w0.15: DD1.17 87.63,73.095 89,71.725 C2.1@89,67.2
  Top Layer w0.3: C2.1@88.975,67.175 C2.1@89,67.2
NetC3_1: C3.1 DD1.20 | length 4.2
  Top Layer w0.15: DD1.20 86.54,69.285 87,68.825 C3.1 ; C3.1@86.905,67.245 C3.1@87,67.15
  Top Layer w0.3: C3.1@87,67.15 C3.1@87.025,67.175
NetDD1_10: DD1.10 DD2.4 | length 24.3
  Top Layer w0.15: DD1.10@94.175,80.715 107.185,80.715 109.625,78.275 109.625,73.163 109.537,73.075 106.92,73.075 DD2.4
NetDD1_12: DD1.12 DD2.1 | length 27.6
  Top Layer w0.15: v2(82.875,79.45) 82.878,79.447 84.823,79.447 DD1.12 DD1.12@84.23,79.445 ; v2(105.15,76.9) 105.152,76.903 106.472,76.903 106.475,76.905 DD2.1
  Bottom Layer w0.15: v2(82.875,79.45) 102.65,79.45 v2@105.175,76.925
NetDD1_13: DD1.13 DD2.2 DD2.3 R3.2 | length 32.6
  Top Layer w0.15: v2(82.875,78.15) 82.887,78.163 84.813,78.163 DD1.13 ; v2(103.025,74.35) 104.6,74.35 R3.2@104.65,74.3 ; DD2.3 104.715,74.365 R3.2@104.65,74.3 ; DD2.2 104.748,75.635 104.65,75.537 R3.2@104.65,74.3
  Bottom Layer w0.15: v2(82.875,78.15) 101.725,78.15 103.025,76.85 v2(103.025,74.35)
NetHL1_2: HL1.2 R1.1 | length 2.1
  Top Layer w0.15: HL1.2@69.175,67 69.175,67.925 69.975,68.725 R1.1@70,68.725
NetHL2_1: HL2.1 R4.2 | length 2.1
  Top Layer w0.15: HL2.1@73.175,67 73.175,67.925 73.975,68.725 R4.2@74,68.725
NetHL3_1: HL3.1 R5.2 | length 2.1
  Top Layer w0.15: HL3.1@77.175,67 77.175,67.925 77.975,68.725 R5.2@78,68.725
NetL1_1: L1.1 VD2.8 | length 2
  Top Layer w0.3: VD2.8 L1.1
NetVD1_1: VD1.1 VD2.1 | length 3.6
  Top Layer w0.5: VD1.1@67.15,76.875 67.18,76.905 VD2.1
nRST: DD1.4 R2.2 | length 7.4
  Top Layer w0.15: v2(92.6,73.1) 92.602,73.098 94.172,73.098 DD1.4@94.175,73.095 ; v2(96.8,74.3) R2.2@97.925,74.3
  Bottom Layer w0.15: v2(92.6,73.1) 93.475,73.1 94.6,74.225 96.725,74.225 v2(96.8,74.3)
RS485_LINK: DD1.5 R5.1 | length 19.3
  Top Layer w0.15: R5.1@78,70.275 v2(78,71.5) ; v2(92.6,74.375) 94.165,74.375 94.175,74.365 DD1.5@94.182,74.358
  Bottom Layer w0.15: v2(78,71.5) 78,72.762 78.088,72.85 91.075,72.85 v2(92.6,74.375)
RS485_N: DD2.7 R6.2 VD3.2 X2.1 | length 15.1
  Top Layer w0.155: DD2.7 112.621,75.635 112.826,75.429 112.826,75.243 112.917,75.153 114.392,75.153 114.483,75.243 114.483,75.458 114.635,75.61 114.8,75.775 115.117,75.458 115.117,75.243 115.208,75.153 116.091,75.153 116.746,74.497 117.914,74.497 118.569,75.153 119.529,75.153 119.62,75.243 ; R6.2@114.61,75.635 R6.2@114.8,75.825 ; VD3.2 119.62,75.243 ; X2.1 122.883,76.693 122.883,76.513 122.792,76.423 122.157,76.423 120.887,75.153 119.711,75.153 119.62,75.243
RS485_P: DD2.6 R6.1 VD3.1 X2.3 | length 15.3
  Top Layer w0.155: DD2.6 112.621,74.365 112.826,74.571 112.826,74.757 112.917,74.847 114.392,74.847 114.483,74.757 114.483,74.542 114.685,74.34 114.8,74.225 115.117,74.542 115.117,74.757 115.208,74.847 115.965,74.847 116.62,74.192 118.04,74.192 118.695,74.847 119.529,74.847 119.62,74.757 ; R6.1@114.71,74.365 R6.1@114.8,74.275 ; VD3.1 119.62,74.757 ; X2.3 123.396,75.334 123.396,76.025 123.303,76.117 122.284,76.117 121.014,74.847 119.711,74.847 119.62,74.757
USB_CFG: DD1.15 R4.1 | length 15.5
  Top Layer w0.15: R4.1@74,70.275 v2(74,71.5) ; v2(82.875,75.625) 82.88,75.63 84.82,75.63 DD1.15
  Bottom Layer w0.15: v2(74,71.5) 74,73.237 74.088,73.325 81.725,73.325 82.875,74.475 v2(82.875,75.625)
USB_D_IN_N: VD2.2 X1.2 | length 10.4
  Top Layer w0.155: X1.2 62.417,76.25 62.045,75.878 62.043,75.878 61.953,75.787 61.953,75.658 62.411,75.2 69.975,75.2 70.235,75.46 70.268,75.46 70.299,75.429 70.504,75.635 VD2.2
USB_D_IN_P: VD2.3 X1.3 | length 10.9
  Top Layer w0.155: X1.3 61.183,76.25 61.555,75.878 61.557,75.878 61.647,75.787 61.647,75.532 62.284,74.895 69.975,74.895 70.085,74.785 70.085,74.751 70.265,74.571 70.299,74.571 70.504,74.365 VD2.3
USB_D_N: DD1.18 VD2.7 | length 10.7
  Top Layer w0.155: VD2.7 76.496,75.635 76.701,75.429 76.701,75.243 76.792,75.153 78.773,75.153 82.583,71.343 84.016,71.343 84.107,71.433 84.107,71.458 84.475,71.825 DD1.18
USB_D_P: DD1.19 VD2.6 | length 10.6
  Top Layer w0.155: VD2.6 76.496,74.365 76.701,74.571 76.701,74.757 76.792,74.847 78.646,74.847 82.456,71.037 84.016,71.037 84.107,70.947 84.107,70.922 84.475,70.555 DD1.19@84.699,70.555
pads on no net: DD1.6 DD1.7 DD1.8 DD1.9 DD1.11 DD1.14 DD1.16 X2.2 X2.4 X2.6

## Polygon pours and split planes (outlines as drawn)
GND on Signal Layer 1 "GND_L02_P056" (solid, pour order 56): 50,87.5 128,87.5 128,62.5 50,62.5
GND on Signal Layer 1 "GND_L02_P046" (solid, pour order 46): 50,87.5 128,87.5 128,62.5 50,62.5
GND on Signal Layer 1 "GND_L02_P002" (solid, pour order 2): 129.075,119.9
GND on Top Layer "GND_L01_P066" (solid, pour order 66): 50,87.5 128,87.5 128,62.5 50,62.5
+5V on Top Layer "+5V_L01_P062" (solid, pour order 62): 80.75,78.25 80.75,75.475 81.8,75.475 81.8,75.55 81.8,78.25
no net on Top Layer "NONET_L01_P060" (solid, pour order 60): 80.75,78
+5V on Top Layer "+5V_L01_P020" (solid, pour order 20): 99.4,75 99.4,75.6 100.9,75.6 101.5,75 101.5,73.6 100.9,73 99.4,73 99.4,73.6
no net on Top Layer "NONET_L01_P028" (solid, pour order 28): 115,79.5
no net on Top Layer "NONET_L01_P024" (solid, pour order 24): 91.8,68
no net on Top Layer "NONET_L01_P012" (solid, pour order 12): 69,63.525
GND on Bottom Layer "GND_L04_P064" (solid, pour order 64): 50,87.5 128,87.5 128,62.5 50,62.5
+5V on Signal Layer 2 "+5V_L03_P070" (solid, pour order 70): 50,87.5 128,87.5 128,62.5 50,62.5

## Silkscreen, mask and mechanical layers (free items; w line width, h text height)
Top Overlay:
  text ".designation" at 51.5,84.9 h2
  text "USB/RS485" at 98.3,83.05 h2
  text "PWR" at 68.4,62.75 h1.2
  text "USB" at 72.5,62.75 h1.2
  text "LINK" at 76.5,62.75 h1.2
Bottom Overlay:
  text ".pcb_dec_number" at 67.725,84.95 h2
Board:
  the board outline again, w0.1
Assembly Notes (Mech5):
  text "'.title'" at 50.25,58.75 h2
  text "'.project'_'.pcb_dec_number'['.Pcb_File_Name_No_Path']" at 50.25,56.25 h2